# Altium PCB PCB.PcbDoc
Units mil, origin at the board's own origin, x right, y up, seen from the top; angles counter-clockwise.
Board outline 5400 x 4115 mil, 2 copper layers (Top Layer, Bottom Layer); 30 components, 82 nets, 286 pads, 47 vias.
Unrouted connection lines stored in the file: 34.
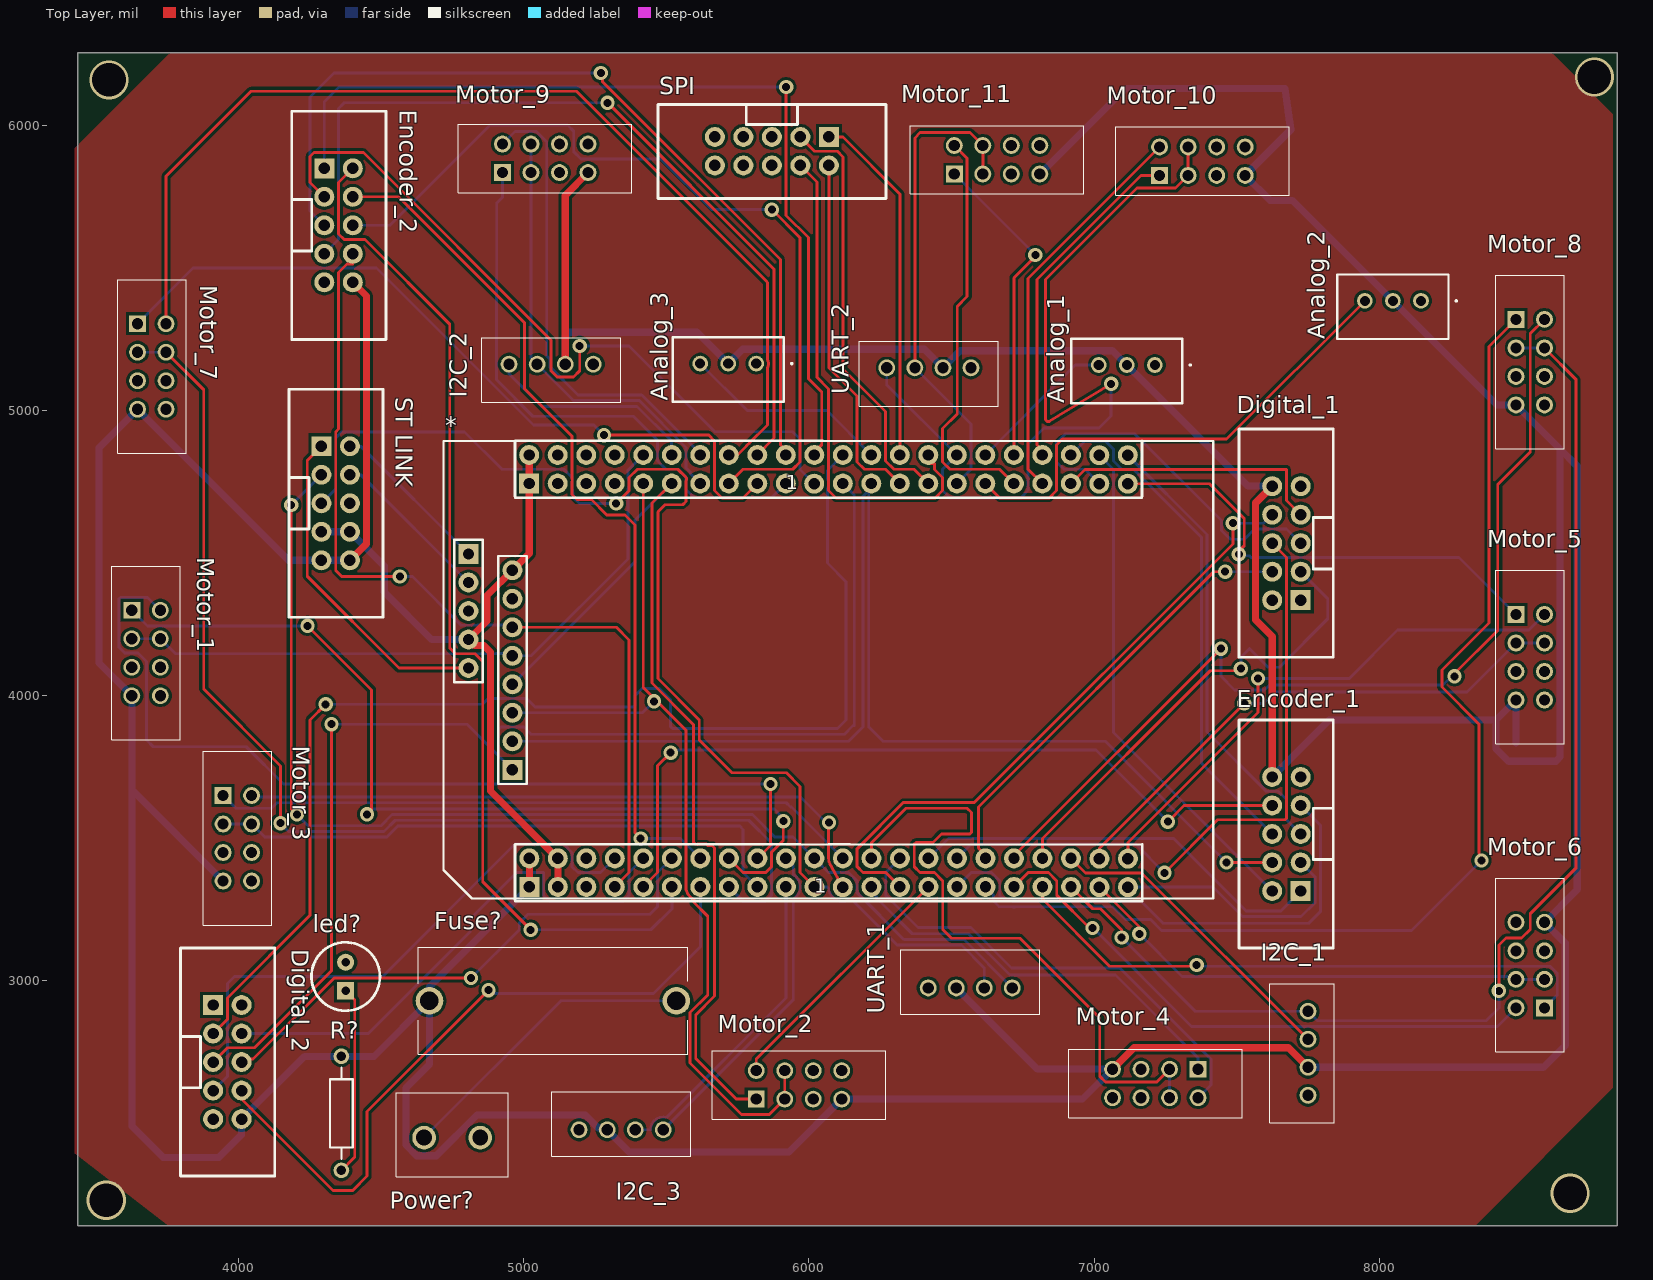
[diagram p0: Top Layer view]
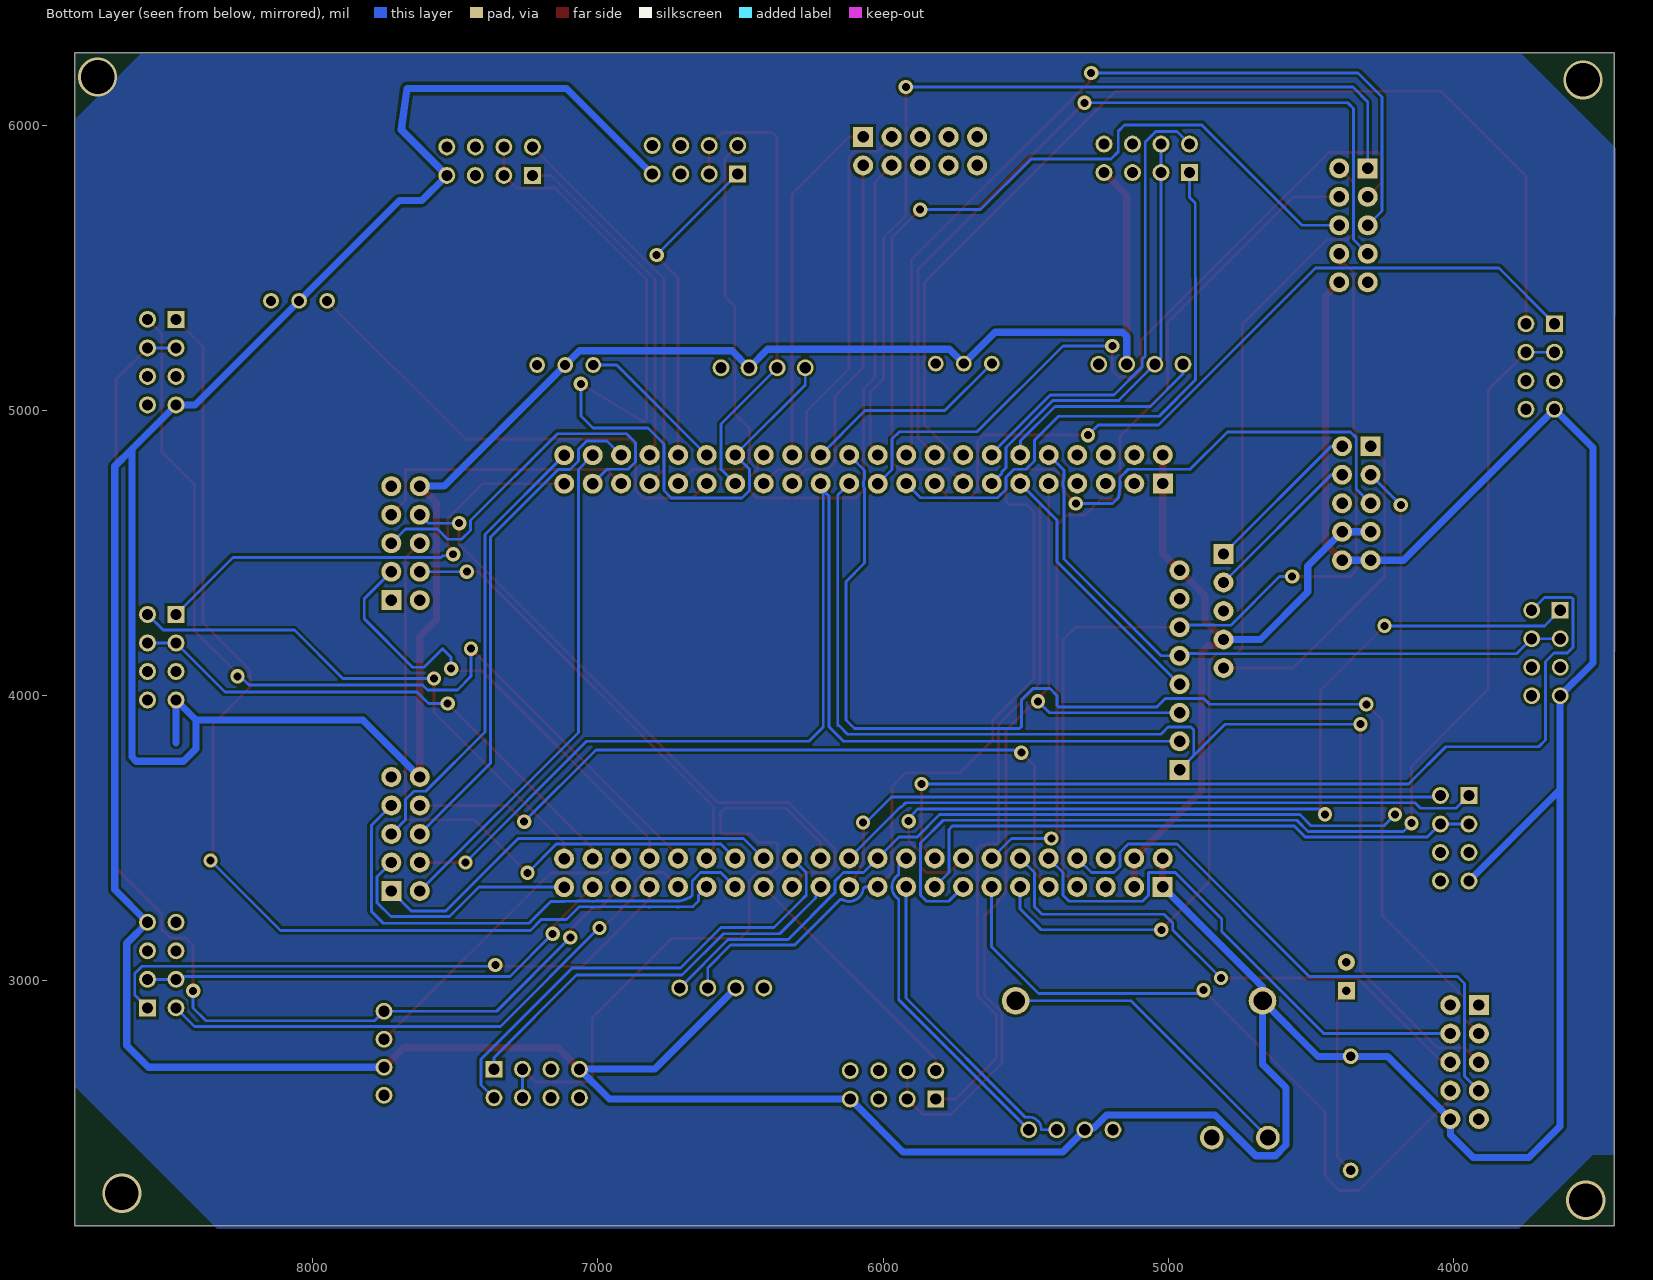
[diagram p1: Bottom Layer view, seen from below]

## Layer stack, top to bottom
Top Solder: solder mask 0.4, Solder Resist, Dk 3.5
Top Layer: signal copper 1.4
Dielectric 1: dielectric 12.6, FR-4, Dk 4.8
Bottom Layer: signal copper 1.4
Bottom Solder: solder mask 0.4, Solder Resist, Dk 3.5

## Board outline
3435,2140 8835,2140 8835,6255 3435,6255

## Design rules (kind name [scope] priority, off if disabled: settings)
Clearance [All] p1: gap=10 ignorepadtopadclearanceinfootprint=FALSE except(0: Arc-Hole Track-Hole SMDPad-Hole THPad-Hole Via-Hole Fill-Hole Poly-Hole Region-Hole Text-Hole)
PolygonConnect [All] p1: connectstyle=Relief reliefconductorwidth=10 reliefentries=4 polygonreliefangle="90 Angle" airgapwidth=10
RoutingVias [All] p1: holewidth=28 width=50 viastyle="Through Hole" minholewidth=28 minwidth=50 maxholewidth=28 maxwidth=50
SolderMaskExpansion [All] p1: expansion=4 istentingtop=FALSE
Width Width_3v [InNet('3V')] p1: maxlimit=30 minlimit=20 preferedwidth=25 minimp=50.000000 maximp=50.000000 favimp=50.000000
Width "width gnd" [InNet('GND')] p2: maxlimit=30 minlimit=20 preferedwidth=25 minimp=50.000000 maximp=50.000000 favimp=50.000000
Width Width_5v [InNet('5V')] p3: maxlimit=30 minlimit=20 preferedwidth=25 minimp=50.000000 maximp=50.000000 favimp=50.000000
30 further rules are at their usual default settings.

## Classes and differential pairs
component class F407VET6: Analog_1 Analog_2 Analog_3 Digital_1 Digital_2 Encoder_1 Encoder_2 Fuse? I2C_2 I2C_3 led? Motor_1 Motor_2 Motor_3 Motor_4 Motor_5 Motor_6 Motor_7 Motor_8 Motor_9 Motor_10 Motor_11 Power? R? SPI "ST LINK" UART_1 UART_2

## Components (designator, comment, footprint, x,y, rotation, side; value= is the part's Value field where it differs from the comment)
* "STM32  F407VET6" MICON 6068.52,4088.7 r90 top
Analog_1 "B3B-XH-A_LF__SN_" B3BXHALFSN 7213.43,5160 r180 top
Analog_2 "B3B-XH-A_LF__SN_" B3BXHALFSN 8146.85,5385 r180 top
Analog_3 "B3B-XH-A_LF__SN_" B3BXHALFSN 5815.3,5165 r180 top
Digital_1 "Header ISP" "Header ISP" 7825,4435 r90 top
Digital_2 "Header ISP" "Header ISP" 3810,2815 r270 top
Encoder_1 "Header ISP" "Header ISP" 7825,3415 r90 top
Encoder_2 "Header ISP" "Header ISP" 4200,5750 r270 top
Fuse? "C3131" C3131 4668.86,2930 r0 top
I2C_1 "B4B-XH-A_LF__SN_" B4BXHALFSN 7750.58,2598.15 r90 top
I2C_2 "B4B-XH-A_LF__SN_" B4BXHALFSN 5243.43,5163.03 r180 top
I2C_3 "B4B-XH-A_LF__SN_" B4BXHALFSN 5193.72,2477.56 r0 top
led? "LED 5mm" "LED 5mm" 4375,3015 r90 top
Motor_1 "Header ISP" 09181089622 3625,4300 r270 top
Motor_2 "Header ISP" 09181089622 5815,2585 r0 top
Motor_3 "Header ISP" 09181089622 3945,3650 r270 top
Motor_4 "Header ISP" 09181089622 7365,2690 r180 top
Motor_5 "Header ISP" 09181089622 8480,4285 r270 top
Motor_6 "Header ISP" 09181089622 8580,2905 r90 top
Motor_7 "Header ISP" 09181089622 3645,5305 r270 top
Motor_8 "Header ISP" 09181089622 8480,5320 r270 top
Motor_9 "Header ISP" 09181089622 4925,5835 r0 top
Motor_10 "Header ISP" 09181089622 7230,5825 r0 top
Motor_11 "Header ISP" 09181089622 6510,5830 r0 top
Power? "KF301-2P" KF3012P 4650,2450 r0 top
R? "Resistor 0.25W" "Resistor 0.25W" 4360,2535 r270 top
SPI "Header ISP" "Header ISP" 5970,6060 r180 top
"ST LINK" "Header ISP" "Header ISP" 4190,4775 r270 top
UART_1 "B4B-XH-A_LF__SN_" B4BXHALFSN 6418.15,2975 r0 top
UART_2 "B4B-XH-A_LF__SN_" B4BXHALFSN 6568.43,5150 r180 top

## Footprints (in the part's own frame and the unit in brackets; to place one, negate y for a bottom-side part, rotate by r counter-clockwise, add the part's x,y. Pads: shape width x height; smd on the part's side, far side on the other; paste and mask are expansions set on the pad)
09181089622 [mm]
  rect 1.5x1.5 hole 1: 1(0,0)
  round 1.5 hole 1: 2(0,2.54) 3(2.54,0) 4(2.54,2.54) 5(5.08,0) 6(5.08,2.54) 7(7.62,0) 8(7.62,2.54)
  silkscreen extent -3.92,-1.78 11.54,4.32, body extent -3.92,-1.73 11.54,4.27, height 5.25
B3BXHALFSN [mm]
  round 1.4 hole 0.9: 1(0,0) 2(2.5,0) 3(5,0)
  silkscreen extent -3.2,-2.35 7.45,3.4, body extent -2.45,-2.35 7.45,3.4, height 7.09
B4BXHALFSN [mm]
  round 1.5 hole 1: 1(0,0) 2(2.5,0) 3(5,0) 4(7.5,0)
  silkscreen extent -2.45,-2.35 9.95,3.4, body extent -2.45,-2.35 9.95,3.4, height 7.52
C3131 [mm]
  round 2.46 hole 1.64: 1(0,0) 2(22,0)
  silkscreen extent -1,-4.75 23,4.75, body extent -1,-4.75 23,4.75, height 10.6
"Header ISP" [mil]
  rect 70x70 hole 40: 1(-100,100)
  round 70 hole 40: 2(-100,200) 3(0,100) 4(0,200) 5(100,100) 6(100,200) 7(200,100) 8(200,200) 9(300,100) 10(300,200)
  silkscreen extent -300,-14 500,316, body extent -300,-20 501,334, height 365
KF3012P [mm]
  round 2.1 hole 1.4: 1(0,0) 2(5,0)
  silkscreen extent -2.5,-3.5 7.5,4, body extent -2.99,-3.35 7.51,4.15, height 10
"LED 5mm" [mil]
  rect 60x60 hole 30: 1(-50,0)
  round 60 hole 30: 2(50,0)
  silkscreen extent -120,-120 120,120, body extent -117,-118 96,118, height 268
MICON [mil] "STM32F407VET6"
  round 70 hole 40: 3V3(-759.34,949.33) 3V3(-659.34,949.33) 3V3(108.46,1262.79) 3V3(351.3,1108.52) 3V3(755.69,1049.72) 5V(-659.34,1049.33) BOOT0(8.46,1262.79) GND(-759.34,849.33) GND(-659.34,849.33) GND(208.46,1262.79) GND(251.3,1108.52) GND(655.69,949.72) GND(655.69,849.72) GND(755.69,949.72) GND(755.69,849.72) PA0(755.69,-550.28) PA1(655.69,-550.28) PA2(755.69,-450.28) PA3(655.69,-450.28) PA4(755.69,-350.28) PA5(655.69,-350.28) PA6(755.69,-250.28) PA7(655.69,-250.28) PA8(-759.34,149.33) PA9(-659.34,49.33) PA10(-759.34,49.33) PA11(-659.34,-50.67) PA12(-760.12,-50.39) PA15(-659.34,-150.67) PB0(755.69,-50.28) PB1(655.69,-50.28) PB3(-659.34,-750.67) PB5(-759.34,-750.67) PB6(-659.34,-850.67) PB7(-759.34,-850.67) PB8(-660.12,-950.39) PB9(-760.12,-950.39) PB10(655.69,449.72) PB11(755.69,549.72) PB12(-48.7,1108.52) PB12(655.69,549.72) PB13(51.3,1108.52) PB13(755.69,649.72) PB14(-148.7,1108.52) PB14(655.69,649.72) PB15(-759.33,749.33) PB15(151.3,1108.52) PC0(755.69,-750.28) PC1(655.69,-750.28) PC2(755.69,-650.28) PC3(655.69,-650.28) PC4(755.69,-150.28) PC5(-248.7,1108.52) PC5(655.69,-150.28) PC6(-759.34,349.33) PC7(-659.34,249.33) PC8(-759.34,249.33) PC9(-659.34,149.33) PC10(-759.34,-150.67) PC11(-659.34,-250.67) PC12(-759.34,-250.67) PC13(655.69,-850.28) PD0(-659.34,-350.67) PD1(-759.34,-350.67) PD2(-659.34,-450.67) PD3(-759.34,-450.67) PD4(-659.34,-550.67) PD5(-759.34,-550.67) PD6(-659.34,-650.67) PD7(-759.34,-650.67) PD8(-659.33,749.33) PD9(-659.34,649.33) PD10(-759.34,649.33) PD11(-659.34,549.33) PD12(-759.34,549.33) PD13(-659.34,449.33) PD14(-759.34,449.33) PD15(-659.34,349.33) PE0(-660.12,-1050.39) PE1(-760.12,-1050.39) PE2(754.92,-1050) PE3(654.92,-1050) PE4(754.92,-950) PE5(654.92,-950) PE6(755.69,-850.28) PE7(755.69,49.72) PE8(654.92,50) PE9(755.69,149.72) PE10(655.69,149.72) PE11(755.69,249.72) PE12(655.69,249.72) PE13(755.69,349.72) PE14(655.69,349.72) PE15(755.69,449.72) SWDIO(308.46,1262.79) VDD(655.69,749.72) VREF(755.69,749.72)
  rect 70x70 hole 40: 3V3(655.69,1049.72) 5V(-759.34,1049.33) PB1(-348.7,1108.52) SWCLK(408.46,1262.79)
  silkscreen extent -809,-1350 806,1350, body extent -810,-1100 806,1313, height 327
"Resistor 0.25W" [mm]
  round 1.4 hole 0.85: 1(-5.08,0) 2(5.08,0)
  silkscreen extent -4.06,-1.02 4.06,1.02, body extent -5.35,-1.27 5.35,1.33, height 2.7

## Part data
*: library part Micon?, "STM32F407VET6"
Analog_1 Analog_2 Analog_3: "Connector", Arrow Part Number=B3B-XH-A(LF)(SN), Manufacturer_Name="JST (JAPAN SOLDERLESS TERMINALS)", Arrow Price/Stock=https://www.arrow.com/en/products/b3b-xh-a-lf-sn/jst-manufacturing?region=europe, Datasheet Link=https://datasheet.lcsc.com/szlcsc/1812131720_JST-Sales-America-B3B-XH-A-LF-SN_C144394.pdf, Height=7mm, Manufacturer_Part_Number=B3B-XH-A(LF)(SN)
Fuse?: "Undefined or Miscellaneous", Manufacturer_Name="Xucheng Elec", Datasheet Link=https://datasheet.lcsc.com/szlcsc/XC-Elec-Shenzhen-5x20-BLX-Fuse-holder_C3131.pdf, Height=10.5mm, Manufacturer_Part_Number=C3131
I2C_1 I2C_2 I2C_3 UART_1 UART_2: "Connector", Arrow Part Number=B4B-XH-A(LF)(SN), Manufacturer_Name="JST (JAPAN SOLDERLESS TERMINALS)", Arrow Price/Stock=https://www.arrow.com/en/products/b4b-xh-a-lf-sn/jst-manufacturing, Datasheet Link=https://datasheet.lcsc.com/szlcsc/JST-Sales-America-B4B-XH-A-LF-SN_C144395.pdf, Height=7mm, Manufacturer_Part_Number=B4B-XH-A(LF)(SN)
Motor_1 Motor_2 Motor_3 Motor_4 Motor_5 Motor_6 Motor_7 Motor_8 Motor_9 Motor_10 Motor_11: library part 09181089622, "Connector", Manufacturer_Name=HARTING, Mouser Part Number=617-09181089622, Datasheet Link=http://uk.rs-online.com/web/p/products/6935182, Height=5.5mm, Manufacturer_Part_Number=09181089622, Mouser Price/Stock=https://www.mouser.co.uk/ProductDetail/HARTING/09181089622?qs=FeiuqfHlVTv2CjJEejdN9Q%3D%3D
Power?: "Connector", Manufacturer_Name="Handson Technology", Datasheet Link=http://www.handsontec.com/dataspecs/terminal%20block-5mm.pdf, Height=10mm, Manufacturer_Part_Number=KF301-2P

## Via types
v1: diameter 50, hole 28, Top Layer to Bottom Layer, 43 vias
v2: diameter 137.5, hole 118, Top Layer to Bottom Layer, 3 vias
v3: diameter 137.75, hole 118, Top Layer to Bottom Layer, 1 vias

## Nets (pads, with @x,y where several pads share a name; then routed paths per layer and width w, separated by ;. In a path a pad name is that pad's centre, name@x,y a point inside that pad or via, vN(x,y) a via of type N, cw(c..) or ccw(c..) an arc to the next point about the centre after c; other vN are vias at no path point)
3V: "ST LINK.7" "ST LINK.8" *.3V3 | length 2478
  Top Layer w25: *.3V3@5018.8,4844.39 5018.8,4744.39 5018.8,4498.8 4960,4440 4871,4351 4871,4262.43 4805.73,4197.16 4827.39,4175.5 4860,4175.5 4883.23,4152.27 4883.23,3665.32 5119.19,3429.36 *.3V3@5119.19,3329.36
  Bottom Layer w25: 4290,4575 4390,4575 4510.42,4454.58 4510.42,4363.27 4676.53,4197.16 *.3V3@4805.73,4197.16
5V: "ST LINK.9" "ST LINK.10" *.5V Analog_1.2 Analog_2.2 Analog_3.2 Digital_1.10 Digital_2.10 Encoder_1.10 Encoder_2.10 Fuse?.1 I2C_1.2 I2C_2.2 I2C_3.2 Motor_1.7 Motor_2.7 Motor_3.7 Motor_4.7 Motor_5.7 Motor_6.7 Motor_7.7 Motor_8.7 Motor_9.7 Motor_10.7 Motor_11.7 R?.1 UART_1.2 UART_2.2 | length 24935.4
  Top Layer w25: 4390,4475 4448,4533 4448,5402 Encoder_2.10 ; *.5V@5019.19,3329.36 *.5V@5019.19,3429.36 ; I2C_2.2 5145,5755 Motor_9.7 ; Motor_4.7 7140,2765 7682.15,2765 I2C_1.2 ; Encoder_1.10 7625,4208 7567,4266 7567,4677 Digital_1.10
  Bottom Layer w25: Motor_3.7 3625,3670 ; 4390,4475 4290,4475 4175,4475 Motor_7.7 3510,4870 3510,4115 Motor_1.7 3625,3670 ; *.5V@5019.19,3329.36 4668.86,2979.02 Fuse?.1 ; I2C_2.2 5145,5260.06 5160,5275.06 5606.82,5275.06 Analog_3.2 5766.94,5215.06 6404.94,5215.06 UART_2.2 6530.06,5210.06 7064.94,5210.06 Analog_1.2 7540,4735 Digital_1.10 ; UART_1.2 6801.57,2690 Motor_4.7 6960,2585 Motor_2.7 5930,2400 5369.71,2400 I2C_3.2 5285.63,2484.08 5260.79,2484.08 5215.27,2529.59 4836.16,2529.59 4692.73,2386.16 4623.56,2386.16 4586.16,2423.56 4586.16,2624.55 4668.86,2707.25 Fuse?.1 ; Motor_11.7 7110,6130 7670,6130 7690,5985 7537.5,5832.5 Motor_10.7 7618.13,5736.87 7696.55,5736.87 8413.43,5020 Motor_8.7 8635,4865 ; Encoder_1.10 7825,3915 8410,3915 ; I2C_1.2 8576.57,2696.57 8653,2773 8653,3132 Motor_6.7 8695,3320 8695,4805 8635,4865 ; 8480,3835 Motor_5.7 8410,3915 ; 3625,3670 3625,2490 3735,2380 3930,2380 4010,2460 Digital_2.10 4230,2735 R?.1 4473.86,2735 Fuse?.1 ; 8410,3915 8410,3813.84 8453.84,3770 8620.36,3770 8635,3784.64 8635,4865
Fuse: Fuse?.2 Power?.1 | length 1083.8
  Bottom Layer w10: Power?.1 5130,2930 Fuse?.2
GND: "ST LINK.6" *.GND Analog_1.1 Analog_2.1 Analog_3.1 Digital_1.9 Digital_2.9 Encoder_1.9 Encoder_2.9 I2C_1.1 I2C_2.1 I2C_3.1 led?.2 Motor_1.8 Motor_2.8 Motor_3.8 Motor_4.8 Motor_5.8 Motor_6.8 Motor_7.8 Motor_8.8 Motor_9.8 Motor_10.8 Motor_11.8 Power?.2 SPI.5 UART_1.1 UART_2.1
Netled?_1: led?.1 R?.2 | length 662.7
  Top Layer w10: R?.2 4407,2382 4407,2933 led?.1
PA_0: *.PA0 Analog_1.3 | length 528.5
  Bottom Layer w10: *.PA0 6934.41,5160 Analog_1.3
PA_1: *.PA1 Analog_2.3 | length 1732
  Top Layer w10: *.PA1 6669.19,4694 6842.8,4694 6868.8,4720 6868.8,4880 6888.8,4900 7465,4900 Analog_2.3
PA_2: *.PA2 Motor_10.3 Motor_10.4 UART_2.4 | length 2993.8
  Top Layer w10: v1(7060,5094) 6842.79,4962.41 6835.86,4962.41 6830,4968.27 6830,5460 7150.47,5780.47 7285.47,5780.47 Motor_10.3 Motor_10.4
  Bottom Layer w10: UART_2.4 6273.15,5090.04 *.PA2 6468.8,4794.39 6468.8,4720 6494.8,4694 6742.8,4694 6768.8,4720 6768.8,4882.8 6825,4939 7018,4939 7060,4981 v1(7060,5094)
PA_3: *.PA3 Motor_11.3 Motor_11.4 UART_2.3 | length 1679.3
  Top Layer w10: UART_2.3 6371.57,5956.57 6390,5975 6565,5975 Motor_11.4 Motor_11.3
  Bottom Layer w10: UART_2.3 6568.8,4952.77 6568.8,4794.39 *.PA3
PA_4: *.PA4 SPI.4 | length 1760
  Top Layer w10: SPI.4 6028,5802 6028,5117 6068.8,5076.2 6068.8,4720 6094.8,4694 6442.8,4694 6468.8,4720 6468.8,4765.1 6440,4793.91 6440,4814 6418.8,4814 *.PA4
PA_5: *.PA5 SPI.3 | length 1489.8
  Top Layer w10: SPI.3 6020,5910 6100,5910 6120,5890 6120,5146 6268.8,4997.2 6268.8,4823.68 6298.09,4794.39 6368.8,4794.39 *.PA5
PA_6: *.PA6 SPI.1 | length 1247.3
  Top Layer w10: SPI.1 6118.97,5960 6318.8,5760.17 *.PA6
PA_7: *.PA7 SPI.2 | length 1262.2
  Top Layer w10: SPI.2 6070,5149.6 6168.8,5050.8 6168.8,4820 6194.41,4794.39 6268.8,4794.39 *.PA7
PA_8: *.PA8 I2C_3.3 | length 1117.3
  Bottom Layer w10: I2C_3.3 5444.47,2477.56 cw(c5489,2477.56) 5496.5,2521.45 5497.31,2521.45 5501.45,2521.45 5919.19,2939.19 *.PA8
PA_9: "ST LINK.3" *.PA9 UART_1.4 | length 4061.4
  Top Layer w10: v1(4184,4669) 4184,3603 v1(4204,3583)
  Bottom Layer w10: v1(4184,4669) 4290,4775 ; v1(4204,3583) 4243,3544 4499,3544 4538,3583 5801.54,3583 5880.22,3504.32 5944.23,3504.32 *.PA9 6069.19,3379.36 6138.85,3379.36 6169.19,3349.02 6169.19,3308.65 6332.84,3145 6543.43,3145 UART_1.4
PA_10: "ST LINK.5" *.PA10 UART_1.3 | length 4364.3
  Top Layer w10: v1(5324,4674) 5368.8,4718.8 5368.8,4765.1 5398.09,4794.39 5540,4794.39 5567.81,4766.58 5570.74,4763.65 5570.74,4759.51 5570.74,4758.17 ccw(c5618.8,4744.39) 5568.8,4744.39 5568.8,4681.2 5557.6,4670 5495,4670 5470,4645 5470,4060 5615,3915 5615,3845 5730,3730 5921.05,3730 5969.19,3681.86 5969.19,3379.36 *.PA10
  Bottom Layer w10: 4290,4675 4340,4725 4340,4905 4360,4925 4792.39,4925 4923,4794.39 5140,4794.39 5167.07,4767.32 5170,4764.39 5170,4755.27 ccw(c5218.8,4744.39) 5168.8,4744.45 ; 5168.8,4744.42 ccw(c5398.06,4744.39) 5174.3,4694.51 5194.8,4674 v1(5324,4674) ; *.PA10 6063.06,3329.36 6065.76,3327.25 cw(c6059.63,3319.36) 6067.87,3325.02 6068.92,3323.5 6069.35,3321.71 cw(c6059.63,3319.36) 6069.51,3320.92 ccw(c6118.92,3328.58) 6143.39,3284.98 6145.88,3284.98 6150.02,3284.98 6310,3125 6535,3125 6615,3045 UART_1.3
PA_11: *.PA11 Motor_3.1 | length 2281.7
  Bottom Layer w10: Motor_3.1 3990,3605 4115,3605 4134.42,3624.42 5920.58,3624.42 5935,3610 5938.55,3610 *.PA11
PA_12: *.PA12 Motor_3.2 | length 2303.6
  Top Layer w10: v1(6070,3555) 6069.19,3554.19 6069.19,3429.36 ccw(c6119.19,3429.36) 6075.71,3404.67 *.PA12
  Bottom Layer w10: Motor_3.2 4050,3645 5970,3645 6060,3555 v1(6070,3555)
PA_15: *.PA15 Motor_4.3 Motor_4.4 | length 2374.7
  Top Layer w10: *.PA15 6219.19,3484.19 6340,3605 6555,3605 6570,3590 6570,3520.86 6564.14,3515 6465,3515 6435,3485 6375.05,3485 6369.19,3479.14 6369.19,3400 6389.84,3379.36 6440,3379.36 6469.19,3350.16 6469.19,3179.81 6500,3149 6740,3149 7020,2869 7020,2665 7040,2645 7220,2645 Motor_4.3
  Bottom Layer w10: Motor_4.4 Motor_4.3
PB_0: *.PB0 Digital_2.3 | length 4316.7
  Top Layer w10: Digital_2.3 3960,2865 3960,2940 4250,3230 4250,3915 v1(4305,3970)
  Bottom Layer w10: v1(4305,3970) 4855,3970 4875,3990 5010,3990 5040,3960 5384.14,3960 5390,3965.86 5390,4000 5415,4025 5475,4025 5515,3985 5515,3890.86 5520.86,3885 6100,3885 6130,3915 6130,4400 6064.68,4465.32 6064.68,4724.4 ccw(c6018.52,4743.62) 6064.68,4762.83 6064.68,4790.27 *.PB0
PB_1: *.PB1 Digital_2.5 | length 4346
  Top Layer w10: Digital_2.5 3960,2765 4055,2765 4325,3035 v1(4325,3900)
  Bottom Layer w10: v1(4325,3900) 4800,3900 4910,3790 ; *.PB1@4960,3740 4910,3790 ; *.PB1@6118.8,4744.39 6159.14,4704.05 6159.14,3895 6155,3895 6125,3865 5025,3865 5000,3890 4920,3890 4910,3880 4910,3790
PB_3: *.PB3 Digital_1.3 | length 1671.6
  Top Layer w10: *.PB3 6819.19,3499.19 7407.73,4087.73 7507.73,4087.73 v1(7515,4095)
  Bottom Layer w10: v1(7515,4095) 7515,4135 7545,4165 7610,4100 7650,4100 7820,4270 7820,4340 Digital_1.3
PB_5: *.PB5 Motor_6.1 | length 2099.4
  Top Layer w10: *.PB5 6819.19,3286.62 7054.82,3051 7356,3051 v1(7360,3055)
  Bottom Layer w10: v1(7360,3055) 7364,3051 8600,3051 8625,3026 8625,2950 Motor_6.1
PB_6: *.PB6 I2C_1.3 | length 1094.1
  Top Layer w10: *.PB6 6969.97,3378.58 7167,3378.58 I2C_1.3
PB_7: *.PB7 I2C_1.4 Motor_8.3 Motor_8.4 | length 4334.1
  Top Layer w10: *.PB7 6995.65,3252.9 7022.29,3252.9 7097,3178.19 v1(7097,3151.55) ; v1(8420,2965) 8420,3125 8445,3150 8500,3150 8530,3180 8530,3235 8690,3395 8690,5110 Motor_8.4
  Bottom Layer w10: v1(7097,3151.55) 7355.12,2893.43 I2C_1.4 7784.01,2860 8375,2860 8420,2905 v1(8420,2965) ; Motor_8.3 Motor_8.4
PB_8: *.PB8 Motor_5.3 Motor_5.4 | length 1895.7
  Top Layer w10: *.PB8 7018.92,3464.92 v1(7527,3973)
  Bottom Layer w10: v1(7527,3973) 7595,3973 7635,4013 8308,4013 Motor_5.3 Motor_5.4
PB_9: *.PB9 Motor_6.3 Motor_6.4 | length 1708.9
  Top Layer w10: *.PB9 7159,3188.5 v1(7159,3165)
  Bottom Layer w10: v1(7159,3165) 7309,3015 8449.61,3015 8450.23,3014.39 8470.61,3014.39 Motor_6.4 Motor_6.3
PB_10: *.PB10 I2C_2.3 Motor_9.3 Motor_9.4 | length 1572.9
  Bottom Layer w10: Motor_9.4 Motor_9.3 5025,5184.61 I2C_2.3 5172.33,5037.27 5172.33,5035 5405,5035 5568.8,4871.2 5568.8,4799.48 5583.45,4784.84 5583.45,4779.75 *.PB10
PB_11: *.PB11 I2C_2.4 | length 750.9
  Bottom Layer w10: I2C_2.4 4948.15,5129.18 5062.33,5015 5396.72,5015 5517.32,4894.39 5517.32,4845.87 *.PB11
PB_12: *.PB12 Motor_2.1 | length 3402.6
  Top Layer w10: *.PB12@5518.8,4744.39 5450,4675.59 5450,4044 5592.07,3901.93 5595,3899 5595,3485.74 cw(c5438.07,3332.79) 5599.26,3481.25 5600.86,3479.76 5608.5,3478.28 5608.71,3478.24 ; 5608.71,3479.36 5639.9,3479.36 5644.26,3475 5660,3475 5669.19,3465.81 5669.19,2946.21 5602.93,2879.95 5602.93,2727.07 5745,2585 Motor_2.1
  Bottom Layer w10: *.PB12@4960,4040 5390,4470 5390,4615.59 *.PB12@5518.8,4744.39
PB_13: *.PB13 Motor_1.3 Motor_1.4 | length 2298.7
  Bottom Layer w10: Motor_1.3 Motor_1.4 3777.84,4147.16 4902,4147.16 4902.84,4148 4960,4148 4960,4140 5025,4140 5365,4480 5365,4725.27 ccw(c5318.8,4744.39) 5365,4763.52 5365,4790.59 *.PB13@5418.8,4844.39
PB_14: *.PB14 Motor_2.3 Motor_2.4 | length 3201.9
  Top Layer w10: *.PB14@5418.8,4744.39 5418.8,4029.2 v1@5462.28,3985.72 ; v1(5456.78,3980.22) v1@5462.28,3985.72 ; Motor_2.4 Motor_2.3 5861,2531 5764,2531 5582.93,2712.07 5582.93,2888.23 5645,2950.3 5645,3226.15 5596.4,3274.75 5596.4,3284.85 cw(c5619.19,3329.36) 5571.5,3314.34 ccw(c5561.98,3311.29) 5569.19,3318.21 5569.19,3322.05 5569.19,3878.81 v1@5462.28,3985.72
  Bottom Layer w10: *.PB14@4960,3940 5416.57,3940 v1(5456.78,3980.22)
PB_15: *.PB15 Encoder_2.8 | length 3165.3
  Top Layer w10: Encoder_2.8 4400,5514 4380,5514 4350,5484 4350,4935 4340,4925 4340,4439 4361,4418 v1(4565,4418) ; *.PB15@4960,4240 5325,4240 5369.19,4195.81 5369.19,3379.37 *.PB15@5319.19,3329.37
  Bottom Layer w10: v1(4565,4418) 4609.16,4418 4780,4247.16 4837.16,4247.16 4838,4248 4952,4248 *.PB15@4960,4240
PC_0: *.PC0 Motor_10.1 | length 1204.6
  Top Layer w10: *.PC0 6818.8,4860.63 6800,4879.43 6800,5460 7165,5825 Motor_10.1
PC_1: *.PC1 Motor_10.2 | length 1392.4
  Top Layer w10: *.PC1 6768.8,4794.39 6768.8,5463.8 Motor_10.2
PC_2: *.PC2 Motor_11.1 | length 1134.6
  Top Layer w10: *.PC2 6718.8,5465.8 6794.22,5541.22 v1(6794.22,5545.78)
  Bottom Layer w10: Motor_11.1 v1(6794.22,5545.78)
PC_3: *.PC3 Motor_11.2 | length 1445.7
  Top Layer w10: Motor_11.2 6555,5885 6555,5400 6520,5365 6520,4988 6468.8,4936.8 6468.8,4820 6494.41,4794.39 6668.8,4794.39 *.PC3
PC_4: *.PC4 Analog_3.3 | length 733.1
  Bottom Layer w10: Analog_3.3 5783.45,5000 6063.19,5000 *.PC4
PC_5: *.PC5 Encoder_1.4 | length 4586.1
  Top Layer w10: v1(7465,3415) Encoder_1.4
  Bottom Layer w10: *.PC5@4960,3840 6138.75,3840 6190,3891.25 6190,4699.73 *.PC5@6210,4719.73 ; v1(7465,3415) 7040,3840 6260,3840 6210,3890 *.PC5@6210,4719.73 ; *.PC5@6210,4719.73 6218.8,4728.53 6218.8,4744.39 6210,4735.59 *.PC5@6210,4719.73
PC_6: *.PC6 Motor_7.3 Motor_7.4 | length 4065
  Top Layer w10: Motor_7.4 3877,5073 3877,4023 4146,3754 v1(4146,3553)
  Bottom Layer w10: Motor_7.3 Motor_7.4 ; v1(4146,3553) 4175,3524 4510,3524 4549,3563 5789,3563 5869.19,3482.81 5869.19,3300 5848.19,3279 5769.55,3279 *.PC6
PC_7: *.PC7 Motor_1.2 | length 3260.2
  Top Layer w10: *.PC7 5865,3475.16 v1(5865,3690)
  Bottom Layer w10: Motor_1.2 3680,4345 3585,4345 3580,4340 3580,4170 3600,4150 3646,4150 3676,4120 3676,3845 3700,3821 4026,3821 4157,3690 v1(5865,3690)
PC_8: *.PC8 Motor_3.3 Motor_3.4 | length 2086.5
  Bottom Layer w10: Motor_3.3 Motor_3.4 4091,3504 4519,3504 4557.67,3542.67 5757.53,3542.67 5769.19,3531 5769.19,3379.36 *.PC8
PC_9: *.PC9 I2C_3.4 | length 1167.7
  Bottom Layer w10: I2C_3.4 5945,2933.56 5945,3285.35 5947.93,3288.28 5948.47,3288.82 ccw(c5919.19,3329.36) 5948.47,3369.89 5947.93,3370.43 5945,3373.36 5945,3403.55 5942.07,3406.48 *.PC9
PC_10: *.PC10 Motor_4.1 | length 1446.5
  Bottom Layer w10: *.PC10 6219.19,3313.12 6236.38,3295.94 6236.38,3290.96 6247.34,3280 6362.34,3165 6560,3165 6705,3020 7075,3020 7365,2730 Motor_4.1
PC_11: *.PC11 Motor_4.2 | length 1682.8
  Bottom Layer w10: *.PC11 6269.19,3379.36 6269.19,3300 6289.84,3279.36 6382.68,3186.52 6568.48,3186.52 6710,3045 7090.27,3045 7399.85,2735.42 7410,2725.27 7410,2635 Motor_4.2
PC_12: *.PC12 Digital_1.8 | length 2226.4
  Top Layer w10: *.PC12 6269.19,3379.36 6189.84,3379.36 6169.19,3400 6169.19,3463.19 6331,3625 6580,3625 7487,4532 v1(7487,4605)
  Bottom Layer w10: v1(7487,4605) 7595,4605 Digital_1.8
PC_13: *.PC13 Digital_1.7 | length 955.6
  Top Layer w10: *.PC13 6968.03,4793.62 7674.38,4793.62 7675,4793 7675,4685 Digital_1.7
PD_0: *.PD0 Encoder_1.1 | length 1469.2
  Bottom Layer w10: *.PD0 6489.19,3499.36 7279.64,3499.36 7534,3245 7655,3245 Encoder_1.1
PD_1: *.PD1 Motor_2.2 | length 894.6
  Top Layer w10: Motor_2.2 5815,2725.16 *.PD1
PD_2: *.PD2 Digital_1.6 | length 2283.3
  Top Layer w10: v1(7247,3378.58) 7433.42,3565 7670,3565 7675,3570 7675,4485 Digital_1.6
  Bottom Layer w10: *.PD2 6569.19,3479.36 7146.23,3479.36 v1(7247,3378.58)
PD_3: *.PD3 Encoder_1.7 | length 1813.3
  Bottom Layer w10: *.PD3 6569.19,3379.36 6640,3379.36 6669.19,3350.16 6669.19,3304.14 6669.19,3300 6673.72,3295.47 6675.05,3294.14 6699.07,3283.58 ccw(c6719.19,3329.36) 6727.19,3280 6811.19,3280 ccw(c6819.19,3329.36) 6827.19,3280 6911.19,3280 ccw(c6919.19,3329.36) 6927.19,3280 7007.09,3280 ccw(c7018.92,3328.58) 7030.74,3280 7073.13,3280 7117.37,3278.61 ccw(c7118.92,3328.58) 7118.3,3278.59 7166,3278 7168.93,3275.07 7242,3202 7753,3202 7795,3244 7795,3545 Encoder_1.7
PD_4: *.PD4 Digital_1.4 | length 1562.4
  Top Layer w10: *.PD4 6619.19,3441.02 6595,3465.21 6595,3610 7420,4435 v1(7460,4435)
  Bottom Layer w10: v1(7460,4435) Digital_1.4
PD_5: *.PD5 Motor_8.1 | length 3980.5
  Top Layer w10: v1(8359,3422) 8351.35,3429.65 8351.35,3446.51 8350,3447.86 8350,3900 8220,4030 8220,4090 8385,4255 8385,5225 Motor_8.1
  Bottom Layer w10: *.PD5 6647.34,3301.21 6647.34,3280 6664.41,3262.93 6667.34,3260 6709.72,3260 ccw(c6719.19,3329.36) 6728.67,3260 6809.72,3260 ccw(c6819.19,3329.36) 6828.67,3260 6909.72,3260 ccw(c6919.19,3329.36) 6928.67,3260 7004.9,3260 ccw(c7018.92,3328.58) 7005.79,3259.82 ccw(c7018.92,3328.58) 7032.93,3260 7065,3260 7067.93,3257.07 7110,3215 7199,3215 7237,3177 8114,3177 v1(8359,3422)
PD_6: *.PD6 Motor_8.2 | length 3375.3
  Top Layer w10: *.PD6 6719.19,3439.19 v1(7445,4165) ; v1(8264.78,4068.22) 8264.78,4077.78 8416,4229 8416,4741 8530,4855 8530,5270 Motor_8.2
  Bottom Layer w10: v1(7445,4165) 7445,4068 7493,4020 7598,4020 7615,4037 8224,4037 8255.22,4068.22 v1(8264.78,4068.22)
PD_7: *.PD7 Motor_6.2 | length 2061.2
  Top Layer w10: *.PD7 6769.19,3379.36 6840,3379.36 6869.19,3350.16 6869.19,3300 6984.19,3185 v1(6995,3185)
  Bottom Layer w10: v1(6995,3185) 6997,3185 7342,2840 8415,2840 Motor_6.2
PD_8: *.PD8 Digital_2.7 | length 2049.1
  Bottom Layer w10: Digital_2.7 3960,2665 3960,2990 3985,3015 4504.84,3015 4969.19,3479.36 5140,3479.36 5169.19,3450.16 5169.19,3400 5189.84,3379.36 5269.18,3379.36 *.PD8
PD_9: *.PD9 Digital_2.4 | length 1865.2
  Bottom Layer w10: Digital_2.4 4454.03,2815 4812.15,3173.12 4812.15,3216.51 4975,3379.36 5069.19,3379.36 5069.19,3300 5090.19,3279 5348.19,3279 5369.19,3300 5369.19,3379.35 *.PD9
PD_10: *.PD10 Encoder_1.8 | length 2752.5
  Top Layer w10: *.PD10 5469.19,3379.36 5469.19,3754.19 v1(5515,3800) ; v1(7259,3558) 7316,3615 Encoder_1.8
  Bottom Layer w10: v1(5515,3800) 5522.65,3807.65 5538.51,3807.65 5540.86,3810 7007,3810 v1(7259,3558)
PD_11: *.PD11 Digital_2.6 | length 1889.1
  Top Layer w10: Digital_2.6 4020.36,2725.36 4050.36,2725.36 4335,3010 v1(4815,3010)
  Bottom Layer w10: v1(4815,3010) 4983.63,3178.63 4983.63,3202.72 5014.55,3233.63 5442.83,3233.63 5469.19,3260 5469.19,3379.36 *.PD11
PD_12: *.PD12 Encoder_2.2 | length 3656.1
  Top Layer w10: Encoder_2.2 4350,5800 4350,5620 4370,5600 4443,5600 4740,5303 4740,4167.16 4760,4147.16 4828.57,4147.16 4855.73,4120 4855.73,3347.27 v1(5024,3179)
  Bottom Layer w10: v1(5024,3179) 5445.37,3179 5519.19,3252.83 *.PD12
PD_13: *.PD13 Encoder_2.4 | length 3068.3
  Top Layer w10: Encoder_2.4 4560,5750 5002,5308 5002,5076.8 5168.8,4910 5168.8,4761.2 cw(c5160.02,4756.42) 5169.82,4754.45 ccw(c5218.8,4744.39) 5168.8,4744.39 5168.8,4706.2 5186.9,4688.1 5236.9,4688.1 5291,4634 5355.14,4634 5390,4599.14 5390,3519 v1(5410,3499)
  Bottom Layer w10: v1(5410,3499) 5549.55,3499 *.PD13
PD_14: *.PD14 Digital_2.8 | length 2478.1
  Top Layer w10: Digital_2.8 4010,2585 4040,2555 cw(c4010,2515) 4050,2545 4330,2265 4400,2265 4450,2315 4450,2541 v1(4876,2967)
  Bottom Layer w10: v1(4876,2967) 4886.82,2967 4898.82,2955 5455,2955 5619.19,3119.19 *.PD14
PD_15: *.PD15 Motor_1.1 | length 3248.5
  Top Layer w10: v1(4241,4245) 4466,4020 4466,3600 v1(4450,3584) ; *.PD15 5769.19,3379.36 5848.55,3379.36 5869.19,3400 5869.19,3451.07 5910,3491.88 v1(5910,3560)
  Bottom Layer w10: Motor_1.1 3680,4245 v1(4241,4245) ; v1(4450,3584) 4469,3603 5879,3603 5888.2,3593.8 5888.2,3592.62 5910,3570.82 v1(5910,3560)
PE_0: *.PE0 Motor_5.2 | length 1918.5
  Top Layer w10: *.PE0 7118.92,3484.92 7575,3941 v1(7575,4060)
  Bottom Layer w10: v1(7575,4060) 7895,4060 8065,4230 8525,4230 Motor_5.2
PE_1: *.PE1 Encoder_1.3 | length 881.1
  Bottom Layer w10: *.PE1 7417.07,3328.58 7520.66,3225 7726.21,3225 7775,3273.79 7775,3365 Encoder_1.3
PE_2: *.PE2 Encoder_1.5 | length 1604.1
  Bottom Layer w10: *.PE2 7396.38,4565.76 7396.38,3872.91 7604.29,3665 7645.71,3665 7675,3635.71 7675,3565 Encoder_1.5
PE_3: *.PE3 Motor_5.1 | length 1652
  Top Layer w10: *.PE3 7404.95,4743.62 7527,4621.57 7527,4526.26 7507.78,4507.04 v1(7507.78,4496.22)
  Bottom Layer w10: v1(7507.78,4496.22) 7512.94,4491.06 7544.22,4491.06 7550.28,4485 8280,4485 Motor_5.1
PE_4: *.PE4 Encoder_1.2 | length 1779.8
  Bottom Layer w10: *.PE4 7068.52,4793.62 7068.52,3871.48 Encoder_1.2
PE_5: *.PE5 Digital_1.5 | length 1327.3
  Bottom Layer w10: *.PE5 6967.75,4794.39 6894.41,4794.39 6868.8,4820 6868.8,4887.8 6900,4919 7142,4919 7447,4614 7447,4580 7478.23,4548.77 7527.22,4548.77 7563.46,4585 7675,4585 Digital_1.5
PE_6: *.PE6 Encoder_1.6 | length 1786.3
  Bottom Layer w10: *.PE6 6968.03,4893.62 7039.24,4893.62 7068.52,4864.33 7068.52,4822.91 7097.81,4793.62 7139.24,4793.62 7376.38,4556.48 7376.38,3763.62 Encoder_1.6
PE_7: *.PE7 Encoder_2.1 | length 3227.8
  Top Layer w10: v1(5920,6135) 5920,5685 5998,5607 5998,5112 6045,5065 6045,4880.25 6018.8,4854.05 *.PE7
  Bottom Layer w10: Encoder_2.1 4300,6083 4352,6135 v1(5920,6135)
PE_8: *.PE8 Encoder_2.3 | length 2683.6
  Top Layer w10: Encoder_2.3 4250,5800 4250,5891.21 4263.79,5905 4437,5905 5095,5247 5095,5140 5117,5118 5174,5118 5196,5140 v1(5196,5227)
  Bottom Layer w10: v1(5196,5227) 5369,5227 5670,4926 5942.8,4926 5968.8,4900 5968.8,4793.34 *.PE8
PE_9: *.PE9 Encoder_2.5 | length 3133.9
  Top Layer w10: v1(5270,6184) 5276.28,6177.72 5276.28,6153.72 5900,5530 5900,4879.43 5918.8,4860.63 *.PE9
  Bottom Layer w10: Encoder_2.5 4250,5700 4250,6100 4334,6184 v1(5270,6184)
PE_10: *.PE10 Motor_9.1 | length 2010.3
  Bottom Layer w10: Motor_9.1 4925,5748.3 4905,5728.3 4905,5468.22 4903.62,5466.84 4903.62,5108.09 5031.33,4980.39 5384.61,4980.39 5468.8,4896.2 5468.8,4823.68 5498.09,4794.39 5540.52,4794.39 5568.8,4766.11 5568.8,4723.68 5598.09,4694.39 5868.8,4694.39 *.PE10
PE_11: *.PE11 Encoder_2.7 | length 2984.9
  Top Layer w10: v1(5293.72,6079.72) 5294.28,6079.72 5877.86,5496.14 5877.86,4903.45 *.PE11
  Bottom Layer w10: Encoder_2.7 4350,5600 4350,6060 4370,6080 5293.43,6080 v1(5293.72,6079.72)
PE_12: *.PE12 Motor_7.1 | length 2711.2
  Top Layer w10: v1(5281,4914) 5648.8,4914 5668.8,4894 5668.8,4720 5694.8,4694 5768.41,4694 *.PE12
  Bottom Layer w10: Motor_7.1 3840,5500 4483.43,5500 5033.43,4950 5245,4950 v1(5281,4914)
PE_13: *.PE13 Motor_7.2 | length 3708.7
  Top Layer w10: Motor_7.2 3745,5822 4043,6120 5185,6120 5852.07,5452.93 5855,5450 5855,5180.34 cw(c5815.3,5165) 5855,5149.66 5855,4950 5790.85,4885.85 ccw(c5818.8,4844.39) 5777.35,4872.35 5749.39,4844.39 *.PE13
PE_14: *.PE14 Encoder_2.6 | length 2988.2
  Top Layer w10: *.PE14 5768.8,4794.39 5943.19,4794.39 5968.8,4820 5968.8,5606.2 v1(5870,5705)
  Bottom Layer w10: Encoder_2.6 4530,5650 4882,6002 5153,6002 5175,5980 5175,5908 5200,5883 5480,5883 5658,5705 v1(5870,5705)
PE_15: *.PE15 Motor_9.2 | length 1641.1
  Bottom Layer w10: Motor_9.2 4969.53,5979.53 5043.44,5979.53 5080.47,5942.5 5080.47,5192.11 5091.1,5181.48 5091.1,5153.96 5190.06,5055 5413.28,5055 5618.8,4849.48 *.PE15
RST: "ST LINK.1" *.BOOT0 | length 1175.8
  Top Layer w10: 4290,4875 4240,4825 4240,4419 4561.84,4097.16 *.BOOT0
SWCLK: "ST LINK.2" *.SWCLK | length 572.2
  Bottom Layer w10: 4390,4875 4427.89,4875 *.SWCLK
SWDIO: "ST LINK.4" *.SWDIO | length 572.2
  Bottom Layer w10: 4390,4775 4427.89,4775 *.SWDIO
pads on no net: *.VDD *.VREF Digital_1.1 Digital_1.2 Digital_2.1 Digital_2.2 Motor_1.5 Motor_1.6 Motor_2.5 Motor_2.6 Motor_3.5 Motor_3.6 Motor_4.5 Motor_4.6 Motor_5.5 Motor_5.6 Motor_6.5 Motor_6.6 Motor_7.5 Motor_7.6 Motor_8.5 Motor_8.6 Motor_9.5 Motor_9.6 Motor_10.5 Motor_10.6 Motor_11.5 Motor_11.6 SPI.6 SPI.7 SPI.8 SPI.9 SPI.10
copper on no net:
  other v2: 3535,2230 8670,2255 8755,6170
  other v3: 3545,6160

## Polygon pours and split planes (outlines as drawn)
no net on Top Layer "NONET_L01_P003" (solid, pour order 3): 3750,2145 8340,2145 8820,2625 8820,6040 8605,6255 3760,6255 3425,5920 3425,2395
no net on Bottom Layer "NONET_L02_P004" (solid, pour order 4): 3435,2390 3510,2390 3770,2130 8335,2130 8835,2630 8830,2635 8830,6025 8600,6255 8595,6250 3760,6250 3430,5920

## Text inside footprints (layer, text, board x,y; h text height)
*: Top Overlay "1" at 5918.8,4724.39 h50; Top Overlay "1" at 6019.19,3309.36 h50